# Altium PCB SW6106 Demo board.PcbDoc (part 3 of 3)
Units mm, origin at the board's own origin, x right, y up, seen from the top; angles counter-clockwise.
Board outline 64 x 25.82 mm, 4 copper layers (Top Layer, Signal, power, Bottom Layer); 54 components, 46 nets, 211 pads, 291 vias.
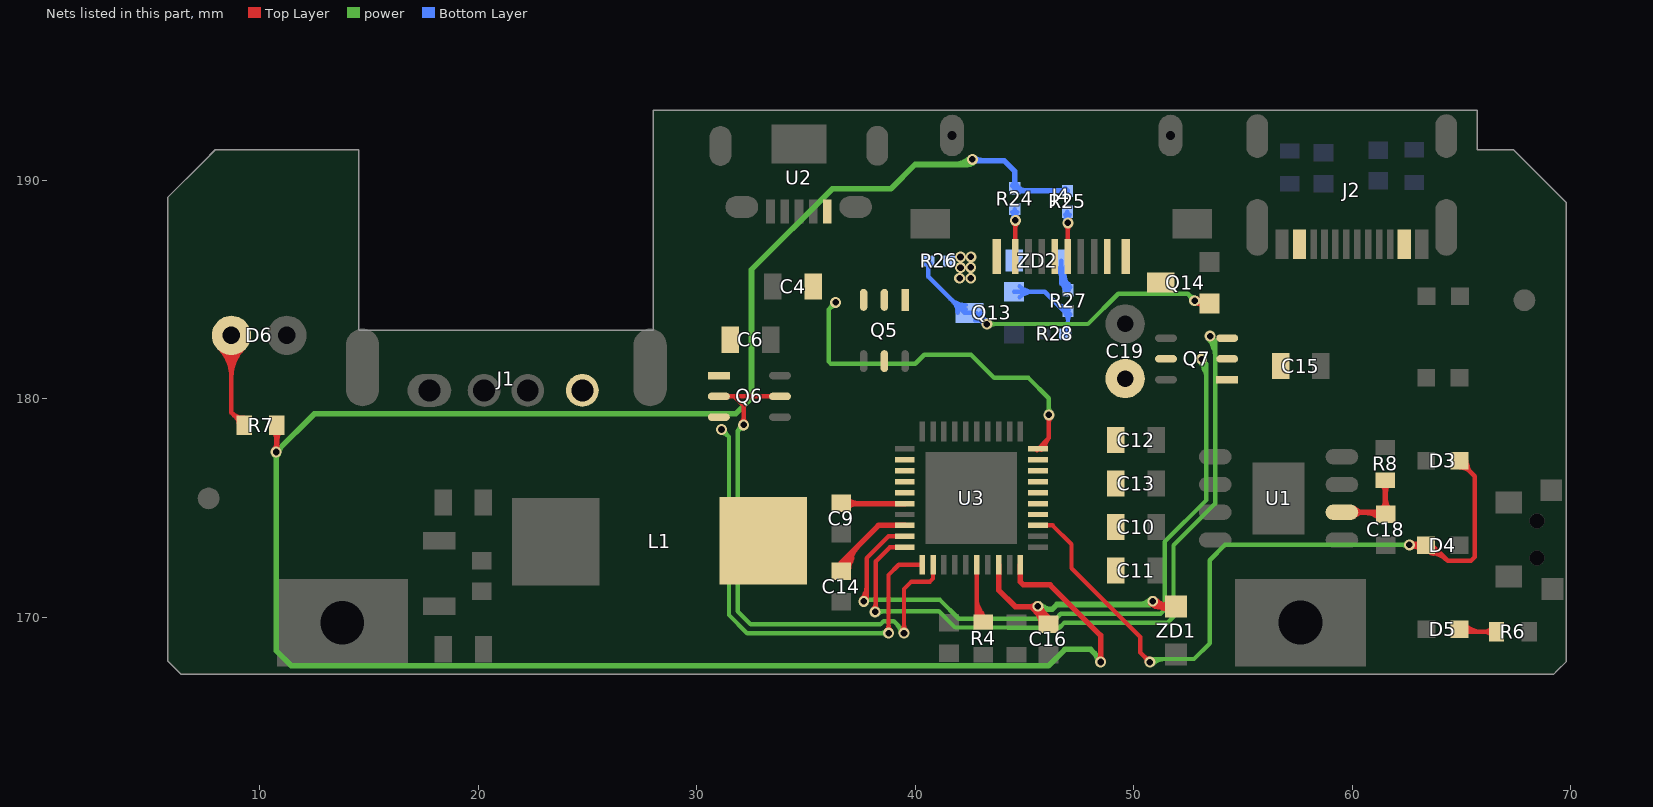
[diagram p5: the nets of this part, all layers, seen from the top]

## Via types
v1: diameter 0.5, hole 0.3, Top Layer to Bottom Layer, tented both sides, 242 vias
v2: diameter 0.508, hole 0.305, Top Layer to Bottom Layer, tented both sides, 49 vias

## Nets (pads, with @x,y where several pads share a name; then routed paths per layer and width w, separated by ;. In a path a pad name is that pad's centre, name@x,y a point inside that pad or via, vN(x,y) a via of type N, cw(c..) or ccw(c..) an arc to the next point about the centre after c; other vN are vias at no path point) (continued)
LED3: D3.1 D4.2 U3.23 | length 62.1
  Top Layer w0.2: U3.23@45.62,174.2 46.291,174.2 47.154,173.337 47.154,172.24 50.298,169.096 50.298,168.386 v1(50.74,167.944) ; v1@50.59,167.944 ccw(c50.228,167.944) 50.484,168.2 ccw(c50.74,168.456) v1@50.74,168.094 ; v1(62.62,173.31) v1@62.649,173.281 ; D3.1@64.916,177.148 65.613,176.451 65.613,172.757 65.437,172.581 64.369,172.581 ; v1@62.649,173.281 cw(c62.649,172.567) D4.2@63.156,173.07 ; v1@62.649,173.281 ccw(c62.649,173.996) D4.2@63.156,173.493 ; v1@62.649,173.281 cw(c62.649,172.567) D4.2@63.156,173.07 ; v1@62.649,173.281 ccw(c62.649,173.996) D4.2@63.156,173.493 ; v1@62.649,173.281 ccw(c62.649,173.996) D4.2@63.156,173.493 ; v1@62.649,173.281 cw(c62.649,172.567) D4.2@63.156,173.07 ; v1@62.649,173.281 D4.2@63.379,173.281 63.669,173.281 64.369,172.581 ; v1@62.695,173.18 cw(c62.841,172.926) 62.917,173.209 ; v1@62.695,173.18 cw(c62.841,172.926) 62.917,173.209 ; v1@62.695,173.18 cw(c62.841,172.926) 62.917,173.209 ; v1@62.695,173.18 cw(c62.841,172.926) 62.917,173.209 ; v1@62.695,173.18 cw(c62.841,172.926) 62.917,173.209 ; v1@62.695,173.18 cw(c62.841,172.926) 62.917,173.209 ; v1@62.724,173.418 ccw(c62.886,173.589) 62.947,173.361 ; v1@62.724,173.418 ccw(c62.886,173.589) 62.947,173.361 ; v1@62.724,173.418 ccw(c62.886,173.589) 62.947,173.361 ; v1@62.724,173.418 ccw(c62.886,173.589) 62.947,173.361 ; v1@62.724,173.418 ccw(c62.886,173.589) 62.947,173.361 ; v1@62.724,173.418 ccw(c62.886,173.589) 62.947,173.361 ; v1@62.726,173.204 cw(c62.913,173.017) 62.913,173.281 ; v1@62.726,173.204 cw(c62.913,173.017) 62.913,173.281 ; v1@62.726,173.204 cw(c62.913,173.017) 62.913,173.281 ; v1@62.726,173.416 ccw(c63.051,173.741) D4.2@63.051,173.281 ; v1@62.726,173.416 ccw(c63.051,173.741) D4.2@63.051,173.281 ; v1@62.726,173.416 ccw(c63.051,173.741) D4.2@63.051,173.281 ; v1@62.75,173.235 cw(c62.96,173.114) 62.897,173.348 ; v1@62.75,173.235 cw(c62.96,173.114) 62.897,173.348 ; v1@62.75,173.235 cw(c62.96,173.114) 62.897,173.348 ; v1@62.75,173.235 cw(c62.96,173.114) 62.897,173.348 ; v1@62.75,173.235 cw(c62.96,173.114) 62.897,173.348 ; v1@62.75,173.235 cw(c62.96,173.114) 62.897,173.348 ; v1@62.75,173.385 ccw(c63.123,173.601) D4.2@63.012,173.184 ; v1@62.75,173.385 ccw(c63.123,173.601) D4.2@63.012,173.184 ; v1@62.75,173.385 ccw(c63.123,173.601) D4.2@63.012,173.184 ; v1@62.75,173.385 ccw(c63.123,173.601) D4.2@63.012,173.184 ; v1@62.75,173.385 ccw(c63.123,173.601) D4.2@63.012,173.184 ; v1@62.75,173.385 ccw(c63.123,173.601) D4.2@63.012,173.184 ; 62.959,173.306 cw(c62.912,173.131) D4.2@63.084,173.188 ; 62.959,173.306 ccw(c62.986,173.406) D4.2@63.084,173.374 ; 62.959,173.306 cw(c62.912,173.131) D4.2@63.084,173.188 ; 62.959,173.306 ccw(c62.986,173.406) D4.2@63.084,173.374 ; 62.959,173.306 ccw(c62.986,173.406) D4.2@63.084,173.374 ; 62.959,173.306 cw(c62.912,173.131) D4.2@63.084,173.188 ; D4.2@63.39,173.181 cw(c63.397,172.285) 64.031,172.919 ; D4.2@63.39,173.181 cw(c63.397,172.285) 64.031,172.919 ; D4.2@63.39,173.181 cw(c63.397,172.285) 64.031,172.919 ; D4.2@63.391,172.981 cw(c63.403,171.616) 64.369,172.581 ; D4.2@63.391,172.981 cw(c63.403,171.616) 64.369,172.581 ; D4.2@63.391,172.981 cw(c63.403,171.616) 64.369,172.581 ; D4.2@63.541,173.023 cw(c63.741,172.683) 63.84,173.065 ; D4.2@63.541,173.023 cw(c63.741,172.683) 63.84,173.065 ; D4.2@63.541,173.023 cw(c63.741,172.683) 63.84,173.065 ; D3.1@64.926,176.848 cw(c64.926,176.148) 65.421,176.643 ; D3.1@64.926,176.848 cw(c64.926,176.148) 65.421,176.643 ; D3.1@64.926,176.848 cw(c64.926,176.148) 65.421,176.643 ; D3.1@65.226,177.148 ccw(c65.974,177.148) 65.445,176.619 ; D3.1@65.226,177.148 ccw(c65.974,177.148) 65.445,176.619 ; D3.1@65.226,177.148 ccw(c65.974,177.148) 65.445,176.619 ; D4.2@63.3,173.236 ccw(c63.889,173.535) 63.723,172.895 cw(c63.889,173.535) D4.2@63.3,173.236 ; D4.2@63.478,173.327 ccw(c64.416,173.802) 64.152,172.784 cw(c64.416,173.802) D4.2@63.478,173.327 ; D3.1@64.947,177.246 cw(c64.851,176.806) 65.286,176.923 ccw(c64.851,176.806) D3.1@64.947,177.246
  power w0.2: v1@50.705,167.979 cw(c50.957,167.727) 50.957,168.084 ; v1(50.74,167.944) 50.88,168.084 52.763,168.084 53.48,168.801 53.48,172.61 54.18,173.31 v1(62.62,173.31) ; v1@50.846,167.838 cw(c51.44,167.244) 51.44,168.084 ; 62.258,173.31 cw(c62.258,172.948) v1@62.514,173.204 ; 62.258,173.31 ccw(c62.258,173.672) v1@62.514,173.416 ; 62.258,173.31 cw(c62.258,172.948) v1@62.514,173.204 ; 62.258,173.31 ccw(c62.258,173.672) v1@62.514,173.416 ; 62.258,173.31 ccw(c62.258,173.672) v1@62.514,173.416 ; 62.258,173.31 cw(c62.258,172.948) v1@62.514,173.204
LED4: U3.24
NetC1_2: 
NetC18_0: 
NetD5_1: D5.1 R6.1 | length 9.6
  Top Layer w0.2: D5.1@64.917,169.455 65.04,169.333 R6.1@66.606,169.333 ; D5.1@64.998,169.526 ccw(c65.465,169.993) 65.465,169.333 ; D5.1@64.998,169.526 ccw(c65.465,169.993) 65.465,169.333 ; D5.1@64.998,169.526 ccw(c65.465,169.993) 65.465,169.333 ; D5.1@65.139,169.243 cw(c65.355,169.027) 65.355,169.333 ; D5.1@65.139,169.243 cw(c65.355,169.027) 65.355,169.333 ; D5.1@65.139,169.243 cw(c65.355,169.027) 65.355,169.333 ; D5.1@65.139,169.667 ccw(c65.947,170.475) 65.947,169.333 ; D5.1@65.139,169.667 ccw(c65.947,170.475) 65.947,169.333 ; D5.1@65.139,169.667 ccw(c65.947,170.475) 65.947,169.333 ; 66.003,169.333 cw(c66.003,168.729) R6.1@66.429,169.156 ; 66.003,169.333 ccw(c66.003,169.936) R6.1@66.429,169.509 ; 66.003,169.333 cw(c66.003,168.729) R6.1@66.429,169.156 ; 66.003,169.333 ccw(c66.003,169.936) R6.1@66.429,169.509 ; 66.003,169.333 ccw(c66.003,169.936) R6.1@66.429,169.509 ; 66.003,169.333 cw(c66.003,168.729) R6.1@66.429,169.156
NetD6_2: D6.2 R7.1 | length 28.8
  Top Layer w0.2: D6.2@8.712,182.898 8.712,179.36 ; R7.1@9.292,178.779 8.712,179.36 ; D6.2@8.146,182.332 cw(c6.78,180.967) 8.712,180.967 ; D6.2@8.146,182.332 cw(c6.78,180.967) 8.712,180.967 ; D6.2@8.146,182.332 cw(c6.78,180.967) 8.712,180.967 ; D6.2@8.288,182.474 cw(c7.263,181.449) 8.712,181.449 ; D6.2@8.288,182.474 cw(c7.263,181.449) 8.712,181.449 ; D6.2@8.288,182.474 cw(c7.263,181.449) 8.712,181.449 ; D6.2@8.429,182.615 cw(c7.746,181.932) 8.712,181.932 ; D6.2@8.429,182.615 cw(c7.746,181.932) 8.712,181.932 ; D6.2@8.429,182.615 cw(c7.746,181.932) 8.712,181.932 ; 8.712,179.36 ccw(c9.269,179.917) R7.1@9.287,179.129 ; 8.712,179.36 ccw(c9.269,179.917) R7.1@9.287,179.129 ; 8.712,179.36 ccw(c9.269,179.917) R7.1@9.287,179.129 ; 8.712,180.967 cw(c10.643,180.967) D6.2@9.277,182.332 ; 8.712,180.967 cw(c10.643,180.967) D6.2@9.277,182.332 ; 8.712,180.967 cw(c10.643,180.967) D6.2@9.277,182.332 ; 8.712,181.449 cw(c10.16,181.449) D6.2@9.136,182.474 ; 8.712,181.449 cw(c10.16,181.449) D6.2@9.136,182.474 ; 8.712,181.449 cw(c10.16,181.449) D6.2@9.136,182.474 ; 8.712,181.932 cw(c9.677,181.932) D6.2@8.995,182.615 ; 8.712,181.932 cw(c9.677,181.932) D6.2@8.995,182.615 ; 8.712,181.932 cw(c9.677,181.932) D6.2@8.995,182.615 ; 8.936,179.135 cw(c8.68,178.879) R7.1@9.042,178.879 ; 8.936,179.135 cw(c8.68,178.879) R7.1@9.042,178.879 ; 8.936,179.135 cw(c8.68,178.879) R7.1@9.042,178.879 ; 8.809,179.246 cw(c8.661,178.637) 9.246,178.861 ccw(c8.661,178.637) 8.809,179.246
NetJ4_1: J4.0@43.738,186.515 J4.8 J4.9 Q14.3
NetJ4_5: J4.5 R25.1 | length 8.5
  Top Layer w0.2: J4.5@46.988,186.515 v1(46.988,188.044) v1@47.105,188.161 ; 46.988,187.681 cw(c47.35,187.681) 47.094,187.937 ccw(c47.35,187.681) 46.988,187.681 ; 46.988,187.681 ccw(c46.625,187.681) 46.881,187.937 cw(c46.625,187.681) 46.988,187.681
  Bottom Layer w0.2: v1@46.858,188.119 ccw(c46.558,188.292) R25.1@46.892,188.381 ; R25.1@46.891,188.384 ccw(c47.212,188.47) v1@47.057,188.176 ; R25.1@46.913,188.386 cw(c46.853,188.228) 47.016,188.272 cw(c47.143,188.306) R25.1@47.062,188.409 ; v1@46.918,188.176 ccw(c46.832,188.339) R25.1@47.016,188.339 ; v1@46.923,188.224 cw(c47.104,188.224) R25.1@47.03,188.39 ; v1@46.923,188.267 ccw(c46.705,188.267) R25.1@46.859,188.421 ; R25.1@46.968,188.556 46.968,188.063 v1(46.988,188.044) ; R25.1@47.016,188.336 ccw(c47.28,188.336) v1@47.094,188.15 ; R25.1@46.859,188.421 cw(c46.596,188.158) v1@46.968,188.158 ; R25.1@46.859,188.421 cw(c46.596,188.158) v1@46.968,188.158 ; v1@46.878,188.146 ccw(c46.737,188.277) R25.1@46.923,188.327 ; v1@46.878,188.146 ccw(c46.737,188.277) R25.1@46.923,188.327 ; v1@46.878,188.146 ccw(c46.737,188.277) R25.1@46.923,188.327 ; R25.1@46.923,188.327 ccw(c47.137,188.384) v1@47.048,188.181 ; R25.1@46.923,188.327 ccw(c47.137,188.384) v1@47.048,188.181 ; R25.1@46.923,188.327 ccw(c47.137,188.384) v1@47.048,188.181 ; v1@46.968,188.158 cw(c47.34,188.158) 47.077,188.421 ccw(c47.34,188.158) v1@46.968,188.158 ; v1@47.094,188.15 cw(c47.397,188.453) 46.968,188.453 ccw(c47.397,188.453) v1@47.094,188.15 ; v1@46.881,188.15 ccw(c46.673,188.358) 46.968,188.358 cw(c46.673,188.358) v1@46.881,188.15
NetJ4_9: J4.1 R24.1 | length 8.7
  Top Layer w0.2: J4.1@44.588,186.515 v1@44.588,188.117 ; v1(44.588,188.158) 44.588,188.241 v1@44.655,188.308 ; 44.588,187.796 cw(c44.95,187.796) 44.694,188.052 ccw(c44.95,187.796) 44.588,187.796 ; 44.588,187.796 ccw(c44.225,187.796) 44.481,188.052 cw(c44.225,187.796) 44.588,187.796
  Bottom Layer w0.2: v1@44.458,188.233 ccw(c44.177,188.395) R24.1@44.49,188.479 ; R24.1@44.48,188.516 ccw(c44.831,188.61) v1@44.659,188.29 ; R24.1@44.506,188.505 cw(c44.444,188.34) 44.614,188.386 cw(c44.751,188.423) R24.1@44.66,188.531 ; v1@44.513,188.332 cw(c44.709,188.332) R24.1@44.626,188.51 ; v1@44.513,188.392 ccw(c44.304,188.392) R24.1@44.452,188.54 ; v1@44.514,188.289 ccw(c44.418,188.459) R24.1@44.614,188.459 ; R24.1@44.561,188.675 44.561,188.185 v1(44.588,188.158) ; R24.1@44.614,188.456 ccw(c44.886,188.456) v1@44.694,188.264 ; R24.1@44.452,188.54 cw(c44.189,188.277) v1@44.561,188.277 ; R24.1@44.452,188.54 cw(c44.189,188.277) v1@44.561,188.277 ; v1@44.471,188.252 ccw(c44.291,188.396) R24.1@44.513,188.455 ; v1@44.471,188.252 ccw(c44.291,188.396) R24.1@44.513,188.455 ; v1@44.471,188.252 ccw(c44.291,188.396) R24.1@44.513,188.455 ; R24.1@44.513,188.455 ccw(c44.75,188.518) v1@44.649,188.295 ; R24.1@44.513,188.455 ccw(c44.75,188.518) v1@44.649,188.295 ; R24.1@44.513,188.455 ccw(c44.75,188.518) v1@44.649,188.295 ; v1@44.561,188.277 cw(c44.933,188.277) 44.67,188.54 ccw(c44.933,188.277) v1@44.561,188.277 ; v1@44.694,188.264 cw(c45.014,188.585) 44.561,188.585 ccw(c45.014,188.585) v1@44.694,188.264 ; v1@44.481,188.264 ccw(c44.29,188.455) 44.561,188.455 cw(c44.29,188.455) v1@44.481,188.264
NetQ1_4: 
NetQ1_6: 
NetQ13_1: Q13.1 R27.2 R28.1 | length 10.1
  Bottom Layer w0.2: Q13.1@44.525,184.893 45.929,184.893 46.815,184.006 R27.2@46.996,184.006 46.996,183.09 R28.1@46.872,182.966 ; Q13.1@44.778,184.64 cw(c45.388,184.03) 45.388,184.893 cw(c45.388,185.755) Q13.1@44.778,185.145 ; R27.2@46.795,184.239 cw(c46.692,183.856) R27.2@47.036,184.054 ; 46.929,183.318 ccw(c47.074,183.234) R28.1@46.982,183.095 ; 46.996,183.609 cw(c47.368,183.609) 47.105,183.872 ccw(c47.368,183.609) 46.996,183.609 ; 46.996,183.609 ccw(c46.624,183.609) 46.887,183.872 cw(c46.624,183.609) 46.996,183.609 ; 46.381,184.44 ccw(c46.996,185.055) 46.996,184.185 cw(c46.996,185.055) 46.381,184.44 ; 46.723,184.099 ccw(c46.996,184.372) 46.996,183.985 cw(c46.996,184.372) 46.723,184.099 ; R28.1@46.789,183.075 ccw(c46.288,183.575) 46.996,183.575 cw(c46.288,183.575) R28.1@46.789,183.075
NetQ13_3: Q13.3 Q14.1 R26.2 | length 29.7
  Top Layer w0.2: v1(52.794,184.481) v1@52.926,184.349 ; v1@52.902,184.377 cw(c53.074,184.213) Q14.1@53.192,184.418 ; Q14.1@53.478,184.349 v1@52.926,184.349 ; v1@52.926,184.349 cw(c52.926,184.101) 53.152,184.203 ccw(c52.926,184.101) v1@52.926,184.349 ; v1@52.926,184.349 ccw(c52.926,184.596) 53.152,184.495 cw(c52.926,184.596) v1@52.926,184.349 ; v1@52.9,184.587 ccw(c53.475,185.162) 53.475,184.349 cw(c53.475,185.162) v1@52.9,184.587
  power w0.2: v1(43.283,183.415) 47.908,183.415 49.293,184.8 52.475,184.8 v1(52.794,184.481) ; 52.545,184.73 cw(c52.296,184.487) v1@52.644,184.483 ; 52.545,184.73 ccw(c52.788,184.979) 52.792,184.631 cw(c52.79,184.983) 52.538,184.737 ; v1@52.644,184.482 ccw(c52.292,184.485) 52.538,184.737 ; 43.645,183.415 cw(c43.645,183.777) 43.389,183.521 ccw(c43.645,183.777) 43.645,183.415 ; 43.645,183.415 ccw(c43.645,183.053) 43.389,183.309 cw(c43.645,183.053) 43.645,183.415 ; 52.538,184.737 cw(c52.282,184.481) 52.644,184.481 ccw(c52.282,184.481) 52.538,184.737 ; 52.538,184.737 ccw(c52.794,184.993) 52.794,184.631 cw(c52.794,184.993) 52.538,184.737
  Bottom Layer w0.2: R26.2@40.607,186.307 40.607,185.579 42.259,183.927 Q13.3@42.493,183.927 42.771,183.927 v1(43.283,183.415) ccw(c42.862,182.994) Q13.3@42.743,183.577 ; 41.609,184.577 ccw(c42.315,185.284) Q13.3@42.315,184.285 ; 41.746,184.44 cw(c41.233,183.927) Q13.3@41.958,183.927 ; Q13.3@41.95,184.236 ccw(c42.315,184.601) Q13.3@42.315,184.085 ; Q13.3@42.802,183.595 cw(c42.975,183.156) 43.211,183.565 cw(c43.396,183.884) Q13.3@43.028,183.906 ; Q13.3@43.028,183.927 ccw(c43.65,183.927) v1@43.21,183.488 ; Q13.3@43.034,183.664 cw(c42.785,183.421) 43.133,183.417 ccw(c42.781,183.419) Q13.3@43.027,183.671 ; Q13.3@43.034,183.664 ccw(c43.277,183.913) 43.281,183.565 cw(c43.279,183.917) Q13.3@43.027,183.671 ; Q13.3@43.047,183.771 ccw(c43.439,183.997) v1@43.322,183.56 ; Q13.3@43.076,183.7 cw(c42.902,183.525) v1@43.139,183.457 ; Q13.3@43.111,183.66 cw(c42.876,183.524) v1@43.138,183.454 ; v1@43.135,183.394 ccw(c42.895,183.36) 43.016,183.569 ccw(c43.137,183.779) v1@43.227,183.554 ; 40.607,185.935 cw(c40.979,185.935) 40.716,186.198 ccw(c40.979,185.935) 40.607,185.935 ; 40.607,185.935 ccw(c40.235,185.935) 40.498,186.198 cw(c40.235,185.935) 40.607,185.935 ; Q13.3@43.027,183.671 cw(c42.771,183.415) 43.133,183.415 ccw(c42.771,183.415) Q13.3@43.027,183.671 ; Q13.3@43.027,183.671 ccw(c43.283,183.927) 43.283,183.565 cw(c43.283,183.927) Q13.3@43.027,183.671
NetR2_2: C18.2 R8.1 U1.6 | length 14.9
  Top Layer w0.254: U1.6@59.53,174.802 61.428,174.802 C18.2@61.52,174.71 ; R8.1@61.52,176.27 C18.2@61.52,174.71 ; C18.2@61.53,174.7 C18.2@61.52,174.71 ; U1.6@60.088,174.644 cw(c60.468,174.264) 60.468,174.802 ; U1.6@60.088,174.644 cw(c60.468,174.264) 60.468,174.802 ; U1.6@60.088,174.644 cw(c60.468,174.264) 60.468,174.802 ; U1.6@60.088,174.96 ccw(c60.468,175.34) 60.468,174.802 ; U1.6@60.088,174.96 ccw(c60.468,175.34) 60.468,174.802 ; U1.6@60.088,174.96 ccw(c60.468,175.34) 60.468,174.802 ; 60.575,174.802 cw(c60.575,173.795) C18.2@61.287,174.507 ; 60.575,174.802 cw(c60.575,173.795) C18.2@61.287,174.507 ; 60.575,174.802 cw(c60.575,173.795) C18.2@61.287,174.507 ; 61.067,174.802 ccw(c61.067,175.113) C18.2@61.287,174.893 ; 61.067,174.802 ccw(c61.067,175.113) C18.2@61.287,174.893 ; 61.067,174.802 ccw(c61.067,175.113) C18.2@61.287,174.893 ; C18.2@61.337,174.893 ccw(c60.895,175.335) 61.52,175.335 ; C18.2@61.337,174.893 ccw(c60.895,175.335) 61.52,175.335 ; C18.2@61.337,174.893 ccw(c60.895,175.335) 61.52,175.335 ; R8.1@61.362,176.112 cw(c60.982,175.732) 61.52,175.732 ; R8.1@61.362,176.112 cw(c60.982,175.732) 61.52,175.732 ; R8.1@61.362,176.112 cw(c60.982,175.732) 61.52,175.732 ; 61.52,175.383 ccw(c62.213,175.383) C18.2@61.723,174.893 ; 61.52,175.383 ccw(c62.213,175.383) C18.2@61.723,174.893 ; 61.52,175.383 ccw(c62.213,175.383) C18.2@61.723,174.893 ; 61.52,175.732 cw(c62.058,175.732) R8.1@61.678,176.112 ; 61.52,175.732 cw(c62.058,175.732) R8.1@61.678,176.112 ; 61.52,175.732 cw(c62.058,175.732) R8.1@61.678,176.112
NetR27_1: R27.1 ZD2.1 | length 11.3
  Bottom Layer w0.2: ZD2.1@46.475,186.003 cw(c45.963,185.491) 46.688,185.491 cw(c47.412,185.491) ZD2.1@46.9,186.003 ; ZD2.1@46.688,186.315 46.688,185.267 R27.1@46.996,184.958 ; 46.718,185.376 ccw(c47.172,185.638) R27.1@47.036,185.132 ; 46.779,185.657 cw(c46.097,185.263) R27.1@46.849,185.029 ; R27.1@46.826,185.191 cw(c46.635,185.081) R27.1@46.847,185.024 ; 47.008,185.262 cw(c46.691,185.079) R27.1@47.04,184.97 ; ZD2.1@46.538,185.956 cw(c46.226,185.416) 46.828,185.577 ccw(c46.226,185.416) ZD2.1@46.538,185.956 ; 46.688,185.618 ccw(c47.63,185.618) 46.964,184.951 cw(c47.63,185.618) 46.688,185.618 ; ZD2.1@46.688,186.101 ccw(c48.113,186.101) 47.105,185.093 cw(c48.113,186.101) ZD2.1@46.688,186.101 ; 46.69,185.265 ccw(c46.996,185.571) 46.996,185.138 cw(c46.996,185.571) 46.69,185.265 ; R27.1@46.751,185.203 cw(c46.532,184.984) 46.842,184.984 ccw(c46.532,184.984) R27.1@46.751,185.203 ; 46.865,185.439 cw(c47.662,185.653) 46.947,186.065 ccw(c47.662,185.653) 46.865,185.439
NTC: R4.2 U3.16 | length 12.4
  Top Layer w0.2: U3.16@42.82,172.4 42.82,170.14 ; R4.2@43.18,169.78 42.82,170.14 ; 42.82,170.14 cw(c42.716,170.036) R4.2@42.829,169.941 ; 42.82,170.14 cw(c42.716,170.036) R4.2@42.829,169.941 ; 42.82,170.14 cw(c42.716,170.036) R4.2@42.829,169.941 ; 42.82,170.384 ccw(c43.624,170.384) R4.2@43.055,169.815 ; 42.82,170.384 ccw(c43.624,170.384) R4.2@43.055,169.815 ; 42.82,170.384 ccw(c43.624,170.384) R4.2@43.055,169.815 ; 42.82,170.866 ccw(c44.106,170.866) R4.2@43.197,169.957 ; 42.82,170.866 ccw(c44.106,170.866) R4.2@43.197,169.957 ; 42.82,170.866 ccw(c44.106,170.866) R4.2@43.197,169.957 ; R4.2@42.838,169.951 ccw(c42.715,170.067) 42.861,170.151 ; R4.2@42.838,169.951 ccw(c42.715,170.067) 42.861,170.151 ; R4.2@42.838,169.951 ccw(c42.715,170.067) 42.861,170.151 ; R4.2@42.858,169.97 ccw(c42.629,170.237) 42.934,170.413 ; R4.2@42.858,169.97 ccw(c42.629,170.237) 42.934,170.413 ; R4.2@42.858,169.97 ccw(c42.629,170.237) 42.934,170.413 ; 42.861,170.151 ccw(c43.077,170.276) R4.2@43.049,170.028 ; 42.861,170.151 ccw(c43.077,170.276) R4.2@43.049,170.028 ; 42.861,170.151 ccw(c43.077,170.276) R4.2@43.049,170.028 ; R4.2@42.988,169.818 ccw(c42.788,170.051) 43.054,170.204 ; R4.2@42.988,169.818 ccw(c42.788,170.051) 43.054,170.204 ; R4.2@42.988,169.818 ccw(c42.788,170.051) 43.054,170.204
SW: C9.2 L1.2 U3.2 U3.3 U3.4 U3.5 U3.6 | length 6
  Top Layer w0.254: C9.2@36.623,175.211 36.634,175.2 U3.6@39.52,175.2 ; C9.2@36.866,175.018 cw(c37.305,174.578) 37.305,175.2 ; C9.2@36.866,175.018 cw(c37.305,174.578) 37.305,175.2 ; C9.2@36.866,175.018 cw(c37.305,174.578) 37.305,175.2 ; C9.2@36.866,175.404 ccw(c37.358,175.896) 37.358,175.2 ; C9.2@36.866,175.404 ccw(c37.358,175.896) 37.358,175.2 ; C9.2@36.866,175.404 ccw(c37.358,175.896) 37.358,175.2
VBUS_A: C6.2 J1.1 Q6.1 Q6.3 U3.11 | length 30.3
  Top Layer w0.2: v1(38.79,169.27) 38.78,169.28 38.78,171.93 39.25,172.4 U3.11@40.32,172.4 ; v1@38.684,169.376 ccw(c38.452,169.608) 38.78,169.608 ; v1@38.684,169.376 ccw(c38.452,169.608) 38.78,169.608 ; v1@38.684,169.376 ccw(c38.452,169.608) 38.78,169.608 ; 38.78,169.656 ccw(c39.176,169.656) v1@38.896,169.376 ; 38.78,169.656 ccw(c39.176,169.656) v1@38.896,169.376 ; 38.78,169.656 ccw(c39.176,169.656) v1@38.896,169.376
  power w0.2: v1(31.14,178.59) 31.48,178.25 31.48,170.1 32.31,169.27 v1(38.79,169.27) ; v1@31.14,178.44 cw(c31.14,178.078) 31.396,178.334 ; v1@31.14,178.44 cw(c31.14,178.078) 31.396,178.334 ; v1@31.14,178.44 cw(c31.14,178.078) 31.396,178.334 cw(c31.652,178.59) v1@31.29,178.59 ; v1@31.14,178.44 cw(c31.14,178.078) 31.396,178.334 ; v1@31.14,178.44 cw(c31.14,178.078) 31.396,178.334 ; v1@31.141,178.44 cw(c31.144,178.088) 31.396,178.334 ; v1@31.141,178.44 cw(c31.144,178.088) 31.396,178.334 ; v1@31.142,178.44 cw(c31.146,178.092) 31.389,178.341 ; v1@31.142,178.44 cw(c31.146,178.092) 31.389,178.341 ; v1@31.142,178.44 cw(c31.146,178.092) 31.389,178.341 ; v1@31.141,178.44 cw(c31.144,178.088) 31.396,178.334 ; v1@31.29,178.588 ccw(c31.638,178.584) 31.389,178.341 ; v1@31.29,178.588 ccw(c31.638,178.584) 31.389,178.341 ; v1@31.29,178.588 ccw(c31.638,178.584) 31.389,178.341 ; v1@31.29,178.589 ccw(c31.642,178.586) 31.396,178.334 ; v1@31.29,178.589 ccw(c31.642,178.586) 31.396,178.334 ; v1@31.29,178.589 ccw(c31.642,178.586) 31.396,178.334 ; v1@31.29,178.59 ccw(c31.652,178.59) 31.396,178.334 ; v1@31.29,178.59 ccw(c31.652,178.59) 31.396,178.334 ; v1@31.29,178.59 ccw(c31.652,178.59) 31.396,178.334 ; v1@31.29,178.59 ccw(c31.652,178.59) 31.396,178.334 ; 38.428,169.27 cw(c38.428,168.908) v1@38.684,169.164 ; 38.428,169.27 ccw(c38.428,169.632) v1@38.684,169.376 ; 38.428,169.27 cw(c38.428,168.908) v1@38.684,169.164 ; 38.428,169.27 ccw(c38.428,169.632) v1@38.684,169.376 ; 38.428,169.27 ccw(c38.428,169.632) v1@38.684,169.376 ; 38.428,169.27 cw(c38.428,168.908) v1@38.684,169.164
VBUS_B: C4.2 J4.4 Q5.1 Q5.3 R26.1 U2.1 U3.30 ZD2.2 | length 24.8
  Top Layer w0.2: U3.30@45.62,177.7 46.12,178.2 ; v1(46.12,179.26) 46.12,178.2 ; U3.30@45.577,177.627 cw(c45.624,177.636) U3.30@45.59,177.67 ; U3.30@45.577,177.627 cw(c45.624,177.636) U3.30@45.59,177.67 ; U3.30@45.577,177.627 cw(c45.624,177.636) U3.30@45.59,177.67 ; U3.30@45.773,177.666 cw(c46.066,177.724) 45.855,177.935 ; U3.30@45.773,177.666 cw(c46.066,177.724) 45.855,177.935 ; U3.30@45.773,177.666 cw(c46.066,177.724) 45.855,177.935 ; U3.30@45.97,177.705 cw(c46.508,177.812) 46.12,178.2 ; U3.30@45.97,177.705 cw(c46.508,177.812) 46.12,178.2 ; U3.30@45.97,177.705 cw(c46.508,177.812) 46.12,178.2 ; v1@46.014,179.154 cw(c45.758,178.898) 46.12,178.898 ; v1@46.014,179.154 cw(c45.758,178.898) 46.12,178.898 ; v1@46.014,179.154 cw(c45.758,178.898) 46.12,178.898 ; 46.12,178.898 cw(c46.482,178.898) v1@46.226,179.154 ; 46.12,178.898 cw(c46.482,178.898) v1@46.226,179.154 ; 46.12,178.898 cw(c46.482,178.898) v1@46.226,179.154
  power w0.2: 36.115,184.154 ccw(c35.866,184.397) 36.214,184.401 cw(c35.862,184.399) 36.108,184.147 ; 36.115,184.154 cw(c36.358,183.905) 36.362,184.253 ccw(c36.36,183.901) 36.108,184.147 ; v1(36.364,184.403) 36.04,184.079 36.04,181.704 36.145,181.599 40.008,181.599 40.419,182.01 42.559,182.01 43.618,180.951 45.186,180.951 46.12,180.018 v1(46.12,179.26) ; 36.108,184.147 cw(c36.364,183.891) 36.364,184.253 ccw(c36.364,183.891) 36.108,184.147 ; 36.108,184.147 ccw(c35.852,184.403) 36.214,184.403 cw(c35.852,184.403) 36.108,184.147 ; v1@46.014,179.366 ccw(c45.758,179.622) 46.12,179.622 ; v1@46.014,179.366 ccw(c45.758,179.622) 46.12,179.622 ; v1@46.014,179.366 ccw(c45.758,179.622) 46.12,179.622 ; 46.12,179.622 ccw(c46.482,179.622) v1@46.226,179.366 ; 46.12,179.622 ccw(c46.482,179.622) v1@46.226,179.366 ; 46.12,179.622 ccw(c46.482,179.622) v1@46.226,179.366
  other v1: 42.037,185.51 42.547,185.51 42.076,185.996 42.547,186.004 42.076,186.482 42.555,186.49
VBUS_C: C15.2 J2.A4 J2.A9 Q7.1 Q7.3 U3.10 | length 41.3
  Top Layer w0.2: v1(38.17,170.24) 38.2,170.27 38.2,172.554 38.846,173.2 U3.10@39.52,173.2 ; v1@38.064,170.346 ccw(c37.735,170.675) 38.2,170.675 ; v1@38.064,170.346 ccw(c37.735,170.675) 38.2,170.675 ; v1@38.064,170.346 ccw(c37.735,170.675) 38.2,170.675 ; 38.2,170.53 ccw(c38.46,170.53) v1@38.276,170.346 ; 38.2,170.53 ccw(c38.46,170.53) v1@38.276,170.346 ; 38.2,170.53 ccw(c38.46,170.53) v1@38.276,170.346
  power w0.2: v1(38.17,170.24) 38.21,170.28 41.08,170.28 41.83,169.53 44.228,169.53 44.238,169.52 46.598,169.52 46.832,169.754 51.56,169.754 51.826,170.02 51.826,173.295 53.729,175.198 53.729,182.631 v1(53.5,182.86) ; v1@38.276,170.134 cw(c38.629,169.781) 38.629,170.28 ; v1@38.276,170.134 cw(c38.629,169.781) 38.629,170.28 ; v1@38.276,170.134 cw(c38.629,169.781) 38.629,170.28 ; v1@38.276,170.346 ccw(c38.436,170.506) 38.436,170.28 ; v1@38.276,170.346 ccw(c38.436,170.506) 38.436,170.28 ; v1@38.276,170.346 ccw(c38.436,170.506) 38.436,170.28 ; v1@53.394,182.754 cw(c52.585,181.945) 53.729,181.945 ; v1@53.394,182.754 cw(c52.585,181.945) 53.729,181.945 ; v1@53.394,182.754 cw(c52.585,181.945) 53.729,181.945 ; v1@53.495,182.71 cw(c53.485,182.439) 53.721,182.575 ; v1@53.495,182.71 cw(c53.485,182.439) 53.721,182.575 ; v1@53.495,182.71 cw(c53.485,182.439) 53.721,182.575 ; v1@53.535,182.895 cw(c53.067,182.427) 53.729,182.427 ; v1@53.535,182.895 cw(c53.067,182.427) 53.729,182.427 ; v1@53.535,182.895 cw(c53.067,182.427) 53.729,182.427 ; v1@53.634,182.793 ccw(c54.087,182.566) 53.648,182.313 cw(c54.087,182.566) v1@53.634,182.793
VCC: C16.2 U3.18 ZD1.2 | length 24.1
  Top Layer w0.254: U3.18@43.82,172.4 43.82,171.242 44.582,170.48 45.3,170.48 ; 45.272,170.48 ccw(c45.272,170.845) v1@45.53,170.587 ; v1@45.486,170.5 ccw(c45.983,170.5) 45.632,170.148 ; v1@45.525,170.581 cw(c45.3,170.78) 45.3,170.48 ; v1(45.617,170.5) v1@45.597,170.48 ; v1@45.736,170.468 ccw(c46.113,170.367) 45.775,170.172 ; C16.2@45.787,169.754 ccw(c45.071,169.954) v1@45.597,170.48 ; 45.855,170.222 cw(c46.134,170.5) 45.74,170.5 ccw(c46.851,170.5) C16.2@46.065,169.715 ; 45.904,170.173 cw(c45.551,169.82) C16.2@46.032,169.685 ; v1@50.782,170.636 ccw(c51.14,170.994) 51.14,170.488 ; v1@50.875,170.606 cw(c50.875,170.309) 51.085,170.519 cw(c51.295,170.729) v1@50.998,170.729 ; v1(50.875,170.729) 51.116,170.488 ; v1@50.962,170.816 ccw(c51.754,171.608) ZD1.2@51.754,170.488 ; v1@50.982,170.791 ccw(c51.742,171.23) ZD1.2@51.515,170.381 ; v1@50.989,170.775 ccw(c51.561,171.008) 51.401,170.412 ; ZD1.2@51.662,170.242 ccw(c51.116,169.761) 51.116,170.488 ; ZD1.2@51.662,170.735 cw(c51.116,171.215) 51.116,170.488 ; ZD1.2@51.942,170.488 51.116,170.488 ; 45.3,170.48 C16.2@46.1,169.68 46.1,169.977 v1@45.597,170.48 ; 45.549,170.231 cw(c44.997,169.68) C16.2@45.777,169.68 ; 45.549,170.231 cw(c44.997,169.68) C16.2@45.777,169.68 ; 45.549,170.231 cw(c44.997,169.68) C16.2@45.777,169.68 ; 45.669,170.111 ccw(c46.05,170.491) C16.2@46.05,169.953 ; 45.669,170.111 ccw(c46.05,170.491) C16.2@46.05,169.953 ; 45.669,170.111 ccw(c46.05,170.491) C16.2@46.05,169.953
  power w0.254: v1(45.617,170.5) 45.76,170.357 46.266,170.357 46.49,170.581 50.727,170.581 v1(50.875,170.729) ; v1@45.704,170.587 ccw(c46.259,171.142) 46.259,170.357 ; 50.221,170.581 ccw(c50.221,171.383) v1@50.788,170.816
VDRV: C14.2 U3.8 | length 15.6
  Top Layer w0.254: C14.2@36.613,172.1 36.613,172.489 38.324,174.2 U3.8@39.52,174.2 ; C14.2@36.553,172.349 ccw(c36.346,172.816) 36.839,172.684 ; C14.2@36.553,172.349 ccw(c36.346,172.816) 36.839,172.684 ; C14.2@36.553,172.349 ccw(c36.346,172.816) 36.839,172.684 ; C14.2@36.654,172.116 ccw(c36.181,172.935) 37.095,172.691 ; C14.2@36.654,172.116 ccw(c36.181,172.935) 37.095,172.691 ; C14.2@36.654,172.116 ccw(c36.181,172.935) 37.095,172.691 ; C14.2@36.682,172.1 cw(c37.789,172.1) 37.006,172.882 ; C14.2@36.682,172.1 cw(c37.789,172.1) 37.006,172.882 ; C14.2@36.682,172.1 cw(c37.789,172.1) 37.006,172.882 ; 36.839,172.684 ccw(c37.403,172.533) C14.2@36.899,172.238 ; 36.839,172.684 ccw(c37.403,172.533) C14.2@36.899,172.238 ; 36.839,172.684 ccw(c37.403,172.533) C14.2@36.899,172.238 ; C14.2@36.936,172.1 cw(c38.656,172.1) 37.44,173.316 ; C14.2@36.936,172.1 cw(c38.656,172.1) 37.44,173.316 ; C14.2@36.936,172.1 cw(c38.656,172.1) 37.44,173.316
VOUT: C10.2 C11.2 C12.2 C13.2 C19.1 Q5.2 Q5.5 Q6.2 Q6.5 Q7.2 Q7.5 U3.9 U3.12 U3.25 U3.26 U3.27 U3.28 U3.29 | length 76.3
  Top Layer w0.2: Q6.2@31.018,180.106 31.71,180.106 ; v1(32.15,178.8) 32.15,179.666 31.71,180.106 ; Q6.5@33.818,180.106 31.71,180.106 ; v1(37.65,170.72) 37.78,170.85 37.78,172.7 38.78,173.7 U3.9@39.52,173.7 ; v1(39.49,169.27) 39.49,171.29 39.83,171.63 40.68,171.63 40.82,171.77 U3.12@40.82,172.4 ; Q6.2@31.396,180.053 cw(c31.524,179.925) 31.524,180.106 ; Q6.2@31.396,180.053 cw(c31.524,179.925) 31.524,180.106 ; Q6.2@31.396,180.053 cw(c31.524,179.925) 31.524,180.106 ; Q6.2@31.396,180.16 ccw(c31.524,180.288) 31.524,180.106 ; Q6.2@31.396,180.16 ccw(c31.524,180.288) 31.524,180.106 ; Q6.2@31.396,180.16 ccw(c31.524,180.288) 31.524,180.106 ; v1@32.044,178.906 ccw(c31.788,179.162) 32.15,179.162 ; v1@32.044,178.906 ccw(c31.788,179.162) 32.15,179.162 ; v1@32.044,178.906 ccw(c31.788,179.162) 32.15,179.162 ; 32.15,179.162 ccw(c32.512,179.162) v1@32.256,178.906 ; 32.15,179.162 ccw(c32.512,179.162) v1@32.256,178.906 ; 32.15,179.162 ccw(c32.512,179.162) v1@32.256,178.906 ; 33.312,180.106 cw(c33.312,179.925) Q6.5@33.44,180.053 ; 33.312,180.106 ccw(c33.312,180.288) Q6.5@33.44,180.16 ; 33.312,180.106 cw(c33.312,179.925) Q6.5@33.44,180.053 ; 33.312,180.106 ccw(c33.312,180.288) Q6.5@33.44,180.16 ; 33.312,180.106 ccw(c33.312,180.288) Q6.5@33.44,180.16 ; 33.312,180.106 cw(c33.312,179.925) Q6.5@33.44,180.053 ; v1@37.544,170.826 ccw(c36.974,171.396) 37.78,171.396 ; v1@37.544,170.826 ccw(c36.974,171.396) 37.78,171.396 ; v1@37.544,170.826 ccw(c36.974,171.396) 37.78,171.396 ; v1@39.384,169.376 ccw(c39.128,169.632) 39.49,169.632 ; v1@39.384,169.376 ccw(c39.128,169.632) 39.49,169.632 ; v1@39.384,169.376 ccw(c39.128,169.632) 39.49,169.632 ; 39.49,169.632 ccw(c39.852,169.632) v1@39.596,169.376 ; 39.49,169.632 ccw(c39.852,169.632) v1@39.596,169.376 ; 39.49,169.632 ccw(c39.852,169.632) v1@39.596,169.376 ; 37.711,171.115 ccw(c37.912,170.999) 37.753,170.829 cw(c37.912,170.999) 37.711,171.115
  power w0.2: v1(32.15,178.8) 31.88,178.53 31.88,170.266 32.476,169.67 38.412,169.67 38.562,169.82 39.018,169.82 39.49,169.348 v1(39.49,169.27) ; v1(37.65,170.72) 37.72,170.79 41.136,170.79 41.996,169.93 46.442,169.93 46.666,170.154 51.23,170.154 51.426,170.35 51.426,173.461 53.329,175.364 53.329,181.591 v1(53.11,181.81) ; 31.894,178.544 ccw(c31.648,178.796) v1@32,178.799 ; 31.894,178.544 cw(c32.146,178.298) v1@32.149,178.65 ; 31.894,178.544 cw(c32.15,178.288) v1@32.15,178.65 ; 31.894,178.544 ccw(c31.638,178.8) v1@32,178.8 ; 31.894,178.544 cw(c32.146,178.298) v1@32.149,178.65 ; 31.894,178.544 ccw(c31.648,178.796) v1@32,178.799 ; 31.894,178.544 ccw(c31.648,178.796) v1@32,178.799 ; 31.894,178.544 cw(c32.146,178.298) v1@32.149,178.65 ; 31.894,178.544 cw(c32.15,178.288) v1@32.15,178.65 ; 31.894,178.544 ccw(c31.638,178.8) v1@32,178.8 ; 31.894,178.544 ccw(c31.638,178.8) v1@32,178.8 ; 31.894,178.544 cw(c32.15,178.288) v1@32.15,178.65 ; 31.894,178.544 cw(c32.15,178.288) v1@32.15,178.65 ; 31.894,178.544 ccw(c31.638,178.8) v1@32,178.8 ; 31.894,178.544 ccw(c31.638,178.8) v1@32,178.8 ; 31.894,178.544 cw(c32.15,178.288) v1@32.15,178.65 ; 31.901,178.551 cw(c32.144,178.302) v1@32.148,178.65 ; 31.901,178.551 ccw(c31.652,178.794) v1@32,178.798 ; 31.901,178.551 ccw(c31.652,178.794) v1@32,178.798 ; 31.901,178.551 cw(c32.144,178.302) v1@32.148,178.65 ; 31.901,178.551 cw(c32.144,178.302) v1@32.148,178.65 ; 31.901,178.551 ccw(c31.652,178.794) v1@32,178.798 ; 39.179,169.659 cw(c38.79,169.27) v1@39.34,169.27 ; 39.179,169.659 cw(c38.79,169.27) v1@39.34,169.27 ; 39.179,169.659 cw(c38.79,169.27) v1@39.34,169.27 ; v1@53.004,181.704 cw(c52.219,180.919) 53.329,180.919 ; v1@53.004,181.704 cw(c52.219,180.919) 53.329,180.919 ; v1@53.004,181.704 cw(c52.219,180.919) 53.329,180.919 ; v1@53.145,181.845 cw(c52.701,181.401) 53.329,181.401 ; v1@53.145,181.845 cw(c52.701,181.401) 53.329,181.401 ; v1@53.145,181.845 cw(c52.701,181.401) 53.329,181.401 ; v1@53.242,181.739 ccw(c53.66,181.515) 53.25,181.279 cw(c53.66,181.515) v1@53.242,181.739
WLED: R7.2 R24.2 R25.2 U3.20 | length 114.5
  Top Layer w0.254: v1(10.76,177.56) 10.793,177.593 R7.2@10.793,178.779 ; U3.20@44.82,172.4 44.82,171.613 44.956,171.477 46.181,171.477 48.49,169.168 v1(48.49,167.95) ; R7.2@10.635,178.521 cw(c10.254,178.141) 10.793,178.141 ; R7.2@10.635,178.521 cw(c10.254,178.141) 10.793,178.141 ; R7.2@10.635,178.521 cw(c10.254,178.141) 10.793,178.141 ; v1@10.673,177.647 ccw(c10.385,177.935) 10.793,177.935 ; v1@10.673,177.647 ccw(c10.385,177.935) 10.793,177.935 ; v1@10.673,177.647 ccw(c10.385,177.935) 10.793,177.935 ; 10.793,178.141 cw(c11.331,178.141) R7.2@10.95,178.521 ; 10.793,178.141 cw(c11.331,178.141) R7.2@10.95,178.521 ; 10.793,178.141 cw(c11.331,178.141) R7.2@10.95,178.521 ; v1@48.403,168.037 ccw(c48.193,168.247) 48.49,168.247 ; v1@48.403,168.037 ccw(c48.193,168.247) 48.49,168.247 ; v1@48.403,168.037 ccw(c48.193,168.247) 48.49,168.247 ; 48.49,168.247 ccw(c48.787,168.247) v1@48.577,168.037 ; 48.49,168.247 ccw(c48.787,168.247) v1@48.577,168.037 ; 48.49,168.247 ccw(c48.787,168.247) v1@48.577,168.037
  power w0.254: 41.768,190.717 ccw(c41.768,191.802) v1@42.535,191.035 ; 42.381,190.717 ccw(c42.381,191.189) v1@42.715,190.855 ; v1(42.622,190.948) 42.391,190.717 39.998,190.717 38.883,189.602 36.207,189.602 32.513,185.908 32.513,180.029 31.786,179.302 12.502,179.302 v1(10.76,177.56) 10.76,168.47 11.451,167.779 46.103,167.779 46.851,168.527 48.029,168.527 48.49,168.066 v1(48.49,167.95) ; v1@10.673,177.473 cw(c10.463,177.263) 10.76,177.263 ; v1@10.673,177.473 cw(c10.463,177.263) 10.76,177.263 ; v1@10.673,177.473 cw(c10.463,177.263) 10.76,177.263 ; 10.76,177.263 cw(c11.057,177.263) v1@10.847,177.473 ; 10.76,177.263 cw(c11.057,177.263) v1@10.847,177.473 ; 10.76,177.263 cw(c11.057,177.263) v1@10.847,177.473 ; 10.97,177.77 cw(c10.76,177.98) 10.76,177.683 ccw(c10.76,177.98) 10.97,177.77 ; 10.97,177.77 ccw(c11.18,177.56) 10.883,177.56 cw(c11.18,177.56) 10.97,177.77 ; 48.198,168.358 cw(c47.79,167.95) v1@48.367,167.95 ; 48.198,168.358 cw(c47.79,167.95) v1@48.367,167.95 ; 48.198,168.358 cw(c47.79,167.95) v1@48.367,167.95
  Bottom Layer w0.254: v1(42.622,190.948) 42.676,190.894 44.071,190.894 44.561,190.404 R24.2@44.561,189.627 44.68,189.508 R25.2@46.968,189.508 ; v1@42.709,191.035 ccw(c43.049,191.375) 43.049,190.894 ; R24.2@44.651,189.692 ccw(c45.093,190.134) 45.093,189.508 ; 44.561,189.959 cw(c44.254,189.959) 44.471,189.742 ccw(c44.254,189.959) 44.561,189.959 ; 44.561,189.959 ccw(c44.867,189.959) 44.651,189.742 cw(c44.867,189.959) 44.561,189.959 ; 46.661,189.508 cw(c46.661,189.202) 46.878,189.418 ccw(c46.661,189.202) 46.661,189.508 ; 46.661,189.508 ccw(c46.661,189.815) 46.878,189.598 cw(c46.661,189.815) 46.661,189.508
pads on no net: "J4. 0" J2.A8 J2.B8 J4.0@41.688,192.045 J4.0@51.688,192.045 J4.0@52.688,188.015 J4.2 J4.3 J4.6 J4.7 S1.5 S1.6
copper on no net: | length 15.1
  Top Layer w0.203: 8.873,175.437 ccw(c7.67,175.437) 8.873,175.437 ; 69.085,184.507 ccw(c67.882,184.507) 69.085,184.507

## Polygon pours and split planes (outlines as drawn)
AGND on Bottom Layer "Top Layer-No Net" (solid, remove dead copper, pour order 26): 4.125,193.31 4.125,167.342 4.483,166.984 4.984,166.483 71.155,166.483 71.155,193.739 72.728,195.312
VBUS_B on Bottom Layer "Top Layer-No Net" (solid, remove dead copper, pour order 34): 41.234,186.866 41.252,186.884 44.499,186.884 44.933,186.884 45.06,186.757 45.159,186.658 45.159,185.898 45.159,185.835 45.078,185.754 44.996,185.672 43.757,185.672 43.341,185.672 43.138,185.469 42.871,185.202 42.283,185.202 41.451,185.202 41.234,185.419
VOUT on Top Layer "Top Layer-No Net" (solid, remove dead copper, pour order 33): 49.61,182.311 50.104,182.311 50.187,182.394 50.193,182.4 50.538,182.4 50.55,182.4 50.602,182.348 50.639,182.311 50.67,182.28 50.67,182.14 50.67,180.16 49.85,179.34 49.85,171.486 49.65,171.286 49.634,171.27 48.556,171.27 47.66,172.166 47.66,174.7 47.29,175.07 45.75,175.07 45.62,175.2 45.62,177.2 45.75,177.33 46.29,177.33 47.36,178.4 47.36,179.67 47.36,181.562 48.124,182.326 48.139,182.311 49.61,182.311
B- on Top Layer "Top Layer-No Net" (solid, remove dead copper, pour order 32): 55,177.11 55,172.71 54.51,172.22 54.5,172.21 54.5,171.94 54.5,167.48 54.63,167.35 54.66,167.38 54.92,167.38 60.5,167.38 60.96,167.84 60.95,167.85 60.95,168.26 60.95,171.543 62.17,172.763 62.18,172.773 62.18,173.23 62.18,173.72 61.9,174 61.27,174 58.79,174 58.56,174.23 58.53,174.26 58.53,174.98 58.53,175.15 58.79,175.41 59.07,175.41 60.24,175.41 60.57,175.74 60.54,175.77 60.54,177.68 60.54,177.74 60.27,178.01 60.23,178.05 59.61,178.05 55.38,178.05 55,177.67 55,177.11
BAT on Top Layer "Top Layer-No Net" (solid, remove dead copper, pour order 31): 10.07,172.48 10.07,167.83 10.53,167.37 10.54,167.36 10.94,167.36 19,167.36 19.29,167.65 19.3,167.66 19.3,167.99 19.3,169.13 19.56,169.39 20.8,169.39 20.81,169.39 21.02,169.6 21.02,169.87 21.02,171.41 20.76,171.67 20.75,171.68 20.18,171.68 19.69,171.68 19.01,171 18.77,171 17.77,171 16.89,171.88 16.87,171.9 15.65,173.12 15.52,173.25 14.04,173.25 10.66,173.25 10.17,172.76 10.07,172.66 10.07,172.48
BATCSP on Top Layer "Top Layer-No Net" (solid, remove dead copper, pour order 28): 17.42,173.7 17.42,173.09 17.47,173.04 17.52,172.99 17.65,172.99 18.79,172.99 19.66,172.12 19.73,172.05 20.7,172.05 20.73,172.05 21.44,171.34 21.47,171.31 22.05,171.31 25.51,171.31 25.77,171.57 25.78,171.58 25.78,172.01 25.78,175.71 25.49,176 24.8,176 19.8,176 19.59,175.79 19.56,175.76 19.56,175.34 19.56,174.64 19.28,174.36 19.24,174.32 18.72,174.32 17.65,174.32 17.42,174.09 17.42,173.7
SW on Top Layer "Top Layer-No Net" (solid, remove dead copper, pour order 25): 39.52,177.2 39.45,177.27 39.39,177.33 39.08,177.33 35.72,177.33 34.94,176.55 34.91,176.52 33.44,176.52 31.4,176.52 30.95,176.07 30.9,176.02 30.9,175.64 30.9,171.56 31.06,171.4 31.07,171.39 31.35,171.39 35.14,171.39 35.3,171.55 35.78,172.03 35.78,174.08 35.78,174.3 35.98,174.5 36.14,174.66 36.93,174.66 38.98,174.66 39.52,175.2 39.52,177.2
VBUS_A on Top Layer "Top Layer-No Net" (solid, remove dead copper, pour order 22): 24.92,181.41 25.51,181.41 25.7,181.22 25.71,181.21 25.71,180.93 25.71,179.68 26.01,179.38 26.51,179.38 28.43,179.38 28.8,179.75 28.94,179.89 28.94,180.36 28.94,183.22 29.24,183.52 29.25,183.53 29.86,183.53 32.05,183.53 32.22,183.36 32.22,183.02 32.22,180.96 32.12,180.86 32.11,180.85 31.37,180.85 31.37,179.78 31.56,179.59 31.643,179.507 31.643,178.781 31.643,178.103 31.13,177.59 31.11,177.57 24.33,177.57 24.27,177.57 23.79,178.05 23.71,178.13 23.71,179.87 23.71,181.2 23.92,181.41 24.92,181.41
VOUT on Top Layer "Top Layer-No Net" (solid, remove dead copper, pour order 20): 31.925,180.682 34.267,180.682 34.5,180.43 34.5,179.825 34.5,179.794 34.443,179.733 34.264,179.539 34.17,179.539 30.577,179.539 30.52,179.6 30.52,180.567 30.62,180.674 30.626,180.682 31.925,180.682
VOUT on Top Layer "Top Layer-No Net" (solid, remove dead copper, pour order 19): 50.197,182.75 50.44,182.5 50.538,182.4 51.102,182.4 54.654,182.4 54.79,182.26 54.79,182.17 54.79,181.42 54.664,181.29 54.498,181.29 50.839,181.29 50.333,180.77 50.09,181.02 50.09,181.49 50.09,182.64 50.197,182.75
AGND on Top Layer "Top Layer-No Net" (solid, remove dead copper, pour order 29): 5.711,190.924 5.351,190.565 5.351,165.341 71.615,165.341 71.854,165.102 71.135,165.821 71.135,192.602 7.089,192.602 5.591,191.104
VOUT on Top Layer "Top Layer-No Net" (solid, remove dead copper, pour order 24): 49.85,179.34 50.639,180.129 50.639,181.111 50.639,181.795 50.09,182.344 50.056,182.311 48.139,182.311 42.51,182.311 41.001,183.82 39.168,183.82 39.168,184.818 38.92,185.065 38.276,185.065 38.051,184.84 38.05,184.839 38.05,183.971 38.05,183.918 37.989,183.857 37.921,183.789 36.552,183.789 36.363,183.789 36.03,183.456 35.388,182.814 35.388,181.898 35.388,181.788 34.274,180.674 34.261,180.661 30.667,180.661 30.667,179.747 30.52,179.6 30.577,179.543 33.699,179.543 36.39,179.543 36.779,179.933 36.795,179.948 40.777,179.948 40.777,179.974 41.048,180.245 41.212,180.409 42.01,180.409 45.62,180.409 46.444,179.584 46.689,179.34 49.85,179.34
VBUS_B on Top Layer "Top Layer-No Net" (solid, remove dead copper, pour order 27): 35.695,189.056 35.695,187.84 35.731,187.804 35.926,187.609 35.926,187.05 35.926,186.685 35.658,186.417 34.84,185.599 34.84,184.967 34.84,184.389 34.965,184.264 35.305,183.924 37.616,183.924 45.607,183.924 46.677,184.994 46.688,185.005 46.688,186.315 46.688,187.291 46.714,187.317 46.678,187.281 46.142,187.281 46.142,185.529 45.996,185.383 45.79,185.177 43.576,185.177 43.43,185.177 43.138,185.469 42.822,185.785 42.822,186.49 42.822,186.55 42.722,186.65 42.633,186.739 40.376,186.739 37.445,186.739 36.832,187.352 36.348,187.836 36.348,188.397 36.348,188.941 36.245,189.044
NetJ4_1 on Top Layer "Top Layer-No Net" (solid, remove dead copper, pour order 30): 43.14,185.594 43.101,185.633 43.101,189.907 43.101,190.465 43.517,190.881 43.699,191.063 46.595,191.063 49.505,191.063 50.129,190.439 50.804,189.764 50.804,189.088 50.804,187.79 51.675,186.919 52.169,186.425 52.169,185.061 52.169,184.996 52,184.827 51.948,184.775 50.428,184.775 49.713,184.775 49.427,185.061 48.609,185.879 48.609,187.166 48.609,188.971 48.414,189.166 48.297,189.283 47.453,189.283 44.504,189.283 44.361,189.14 44.205,188.984 44.205,188.335 44.205,185.828 43.971,185.594
VBUS_C on Top Layer "Top Layer-No Net" (solid, remove dead copper, pour order 35): 53.796,180.511 53.807,180.522 57.159,180.522 57.187,180.522 57.451,180.786 57.621,180.956 57.621,182.089 57.621,182.56 58.104,183.043 58.488,183.427 60.655,183.427 60.962,183.427 61.863,184.328 62.726,185.191 62.726,186.994 62.726,187.589 62.573,187.742 62.556,187.759 62.046,187.759 62.046,186.274 61.962,186.19 61.475,185.703 60.423,185.703 58.115,185.703 58.031,185.787 57.94,185.878 57.94,186.899 57.94,187.752 57.925,187.767 57.254,187.767 57.254,184.979 56.734,184.459 55.45,183.175 54.645,183.175 53.626,183.175 53.565,183.114 53.37,182.919 53.37,182.527 53.37,180.532 53.354,180.516
AGND on power "Top Layer-No Net" (solid, remove dead copper, pour order 23): 4.613,192.086 4.47,191.943 4.47,165.833 71.07,165.833 71.571,166.333 71.571,194.232
AGND on Signal "Top Layer-No Net" (solid, remove dead copper, pour order 21): 4.345,192.171 4.345,166.347 4.703,165.989 4.846,165.846 72.018,165.846 72.018,194.532 71.732,194.818
AGND on Bottom Solder "Top Layer-No Net" (solid): 36.758,177.736 37.206,177.736 38.03,178.56 38.291,178.821 44.38,178.821 51.979,178.821 52.7,178.1 53.21,177.59 53.21,176.35 53.21,172.61 52.45,171.85 51.779,171.179 37.65,171.179 22.351,171.179 21.41,172.12 21.37,172.16 21.37,173.48 21.37,176.43 22.4,177.46 22.676,177.736 36.758,177.736

## Keep-outs
Keep-Out Layer:
  circle w0.127: c7.706,169.388 r1
  circle w0.127: c67.666,188.388 r0.9
  circle w0.127: c7.906,188.388 r0.9
  circle w0.127: c7.706,169.388 r1
  lines w0.127: 1.786,191.388 5.786,191.388 ; 5.786,163.901 5.786,167.401 ; 5.786,168.531 5.786,167.388 6.87,167.388 ; 5.786,185.371 5.786,186.388 cw(c12.786,186.388) 7.13,190.512 ; 5.786,185.388 5.786,168.388 ccw(c6.786,168.388) 6.786,167.388 68.786,167.388 ccw(c68.786,168.388) 69.786,168.388 ; 5.786,186.159 5.786,191.388 ; 7.116,190.508 cw(c9.24,188.383) 9.24,191.388 ; 14.286,191.388 14.584,191.388 ; 14.54,183.158 14.54,191.388 ; 28,183.158 28,193.388 ; 28.013,193.201 60.901,193.201 65.73,193.201 65.73,191.388 66.162,191.388 ; 68.749,167.388 69.786,167.388 ; 68.753,190.042 68.286,190.508 ccw(c66.162,188.383) 66.162,191.388 ; 68.757,190.041 cw(c62.786,186.388) 69.786,186.388 ; 69.786,163.901 69.786,167.401 ; 69.786,170.888 69.786,175.888 ; 69.786,172.376 69.786,168.376 69.786,167.388 ; 69.786,172.588 69.786,168.388 ; 69.786,173.576 69.786,186.376 ; 69.786,174.588 69.786,185.388 ; 69.786,185.482 69.786,191.388 ; 69.786,186.159 69.786,191.388 ; 70.786,167.388 cw(c70.786,168.388) 69.786,168.388 ; 70.87,167.388 69.786,167.388 ; 71.13,190.512 ccw(c76.786,186.388) 69.786,186.388 ; 71.887,191.388 69.786,191.388 ; 5.786,191.388 7.887,191.388 14.422,191.388 ; 7.786,172.388 5.786,172.388 7.786,172.388 ; 7.786,172.388 7.786,173.588 ; 7.786,172.388 7.786,173.588 ; 7.786,173.588 5.786,173.588 7.786,173.588 ; 14.422,191.388 ccw(c14.422,191.388) 14.422,191.388 ; 66.162,191.388 69.786,191.388 ; 69.786,167.388 69.786,168.531 69.786,167.388 ; 69.786,167.388 69.786,168.388 ; 69.786,168.388 69.786,185.388 ; 69.786,168.388 69.786,185.388 ; 69.786,185.388 69.786,186.388 ; 69.786,186.388 69.786,185.371 69.786,186.388 ; 69.786,172.388 71.786,172.388 69.786,172.388 ; 69.786,173.588 71.786,173.588 69.786,173.588

## Silkscreen, mask and mechanical layers (free items; w line width, h text height)
Top Overlay:
  text "+" at 64.46,186.181 h0.6
  text "+" at 64.485,182.27 h0.6
  text "+" at 64.409,178.333 h0.6
  text "+" at 64.384,174.777 h0.6
  text "B+" at 12.677,172.208 h1.2
  text "B-" at 52.064,171.26 h1.2
  text "+" at 64.409,170.916 h0.6
Bottom Overlay:
  drawing of 4883 lines, arcs and shapes, not listed
  text "SW6106_DEMO_20190524" at 69.604,179.215 h1
  text "B+" at 14.634,172.118 h1.2
  text "B-" at 58.721,172.016 h1.2
Mechanical 1:
  drawing of 159 lines, arcs and shapes, not listed